# Altium PCB TDA7000v2.PcbDoc
Units mm, origin at the board's own origin, x right, y up, seen from the top; angles counter-clockwise.
Board outline 70 x 54 mm, 2 copper layers (Top Layer, Bottom Layer); 50 components, 34 nets, 132 pads, 13 vias.
Unrouted connection lines stored in the file: 19.
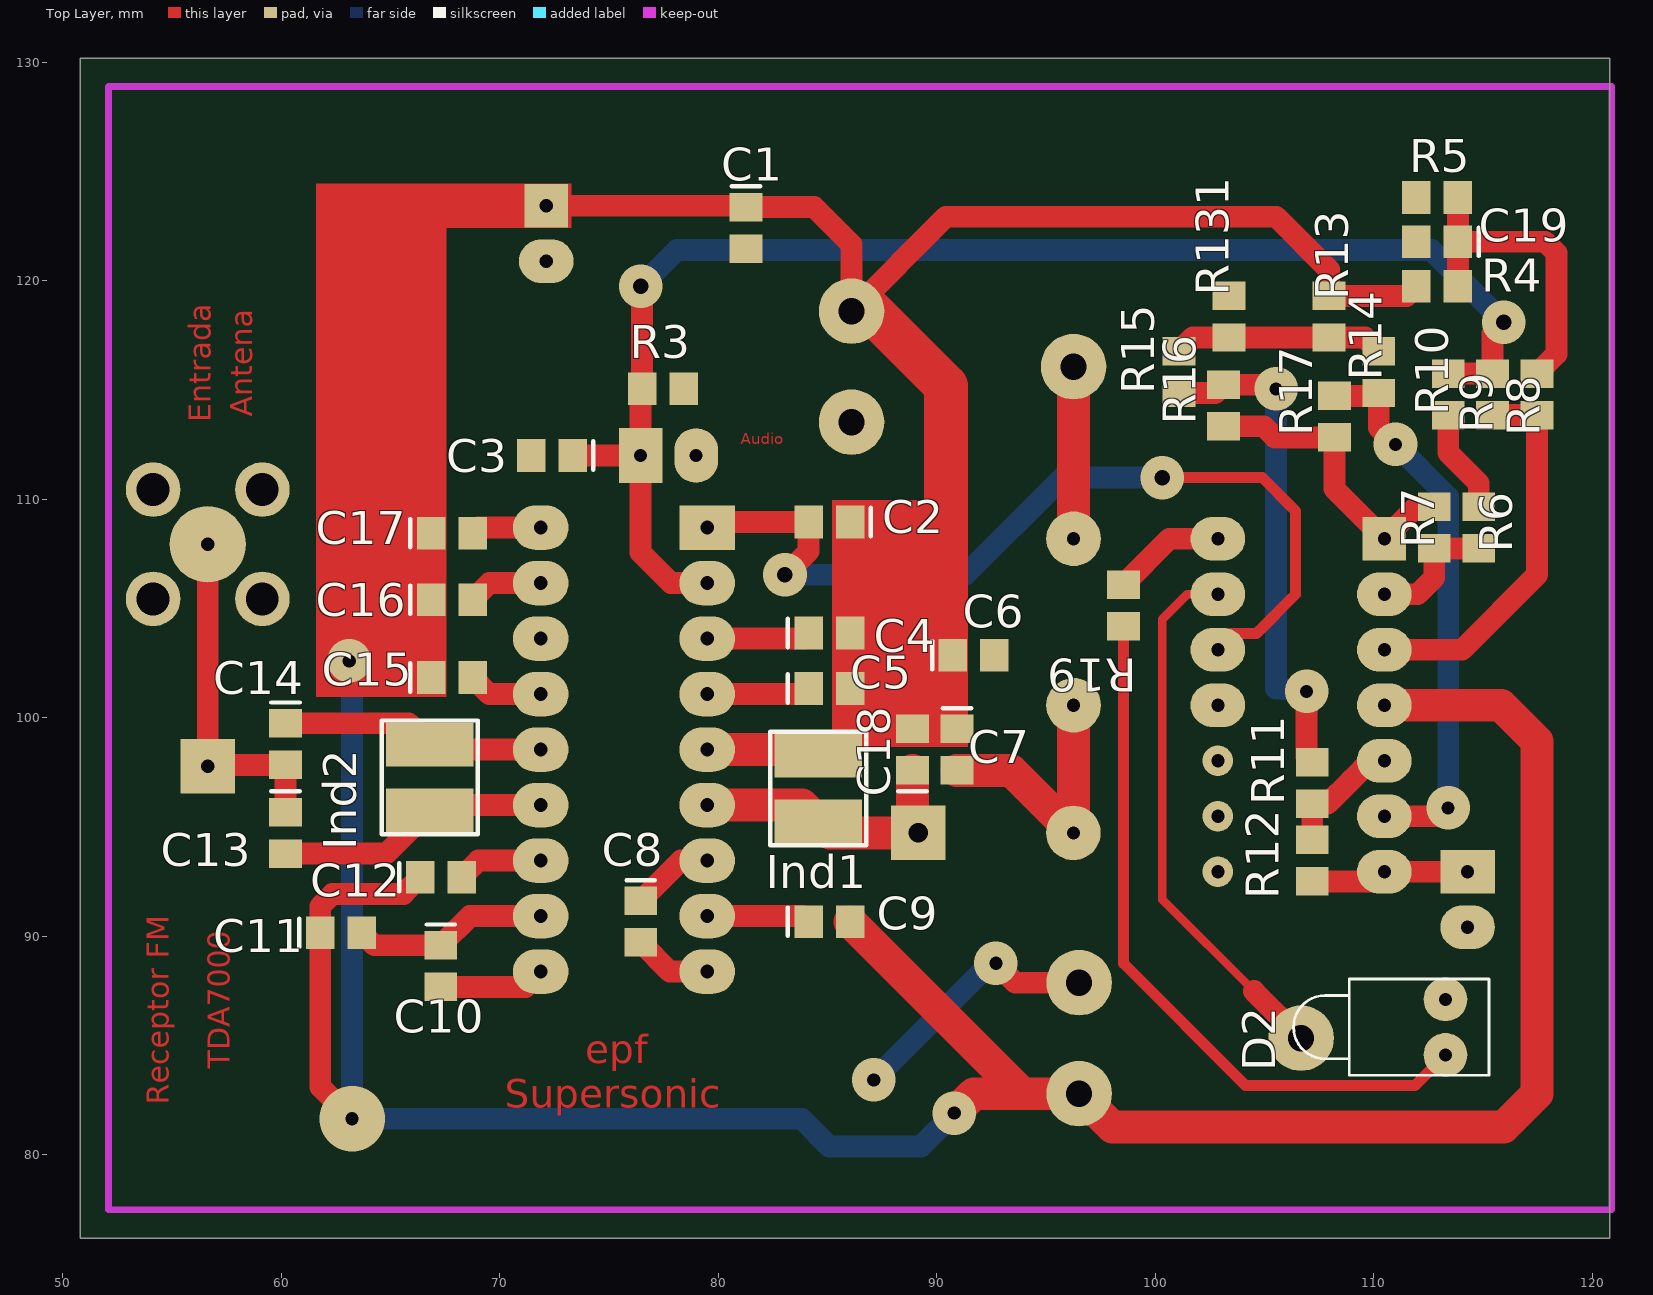
[diagram p0: Top Layer view]
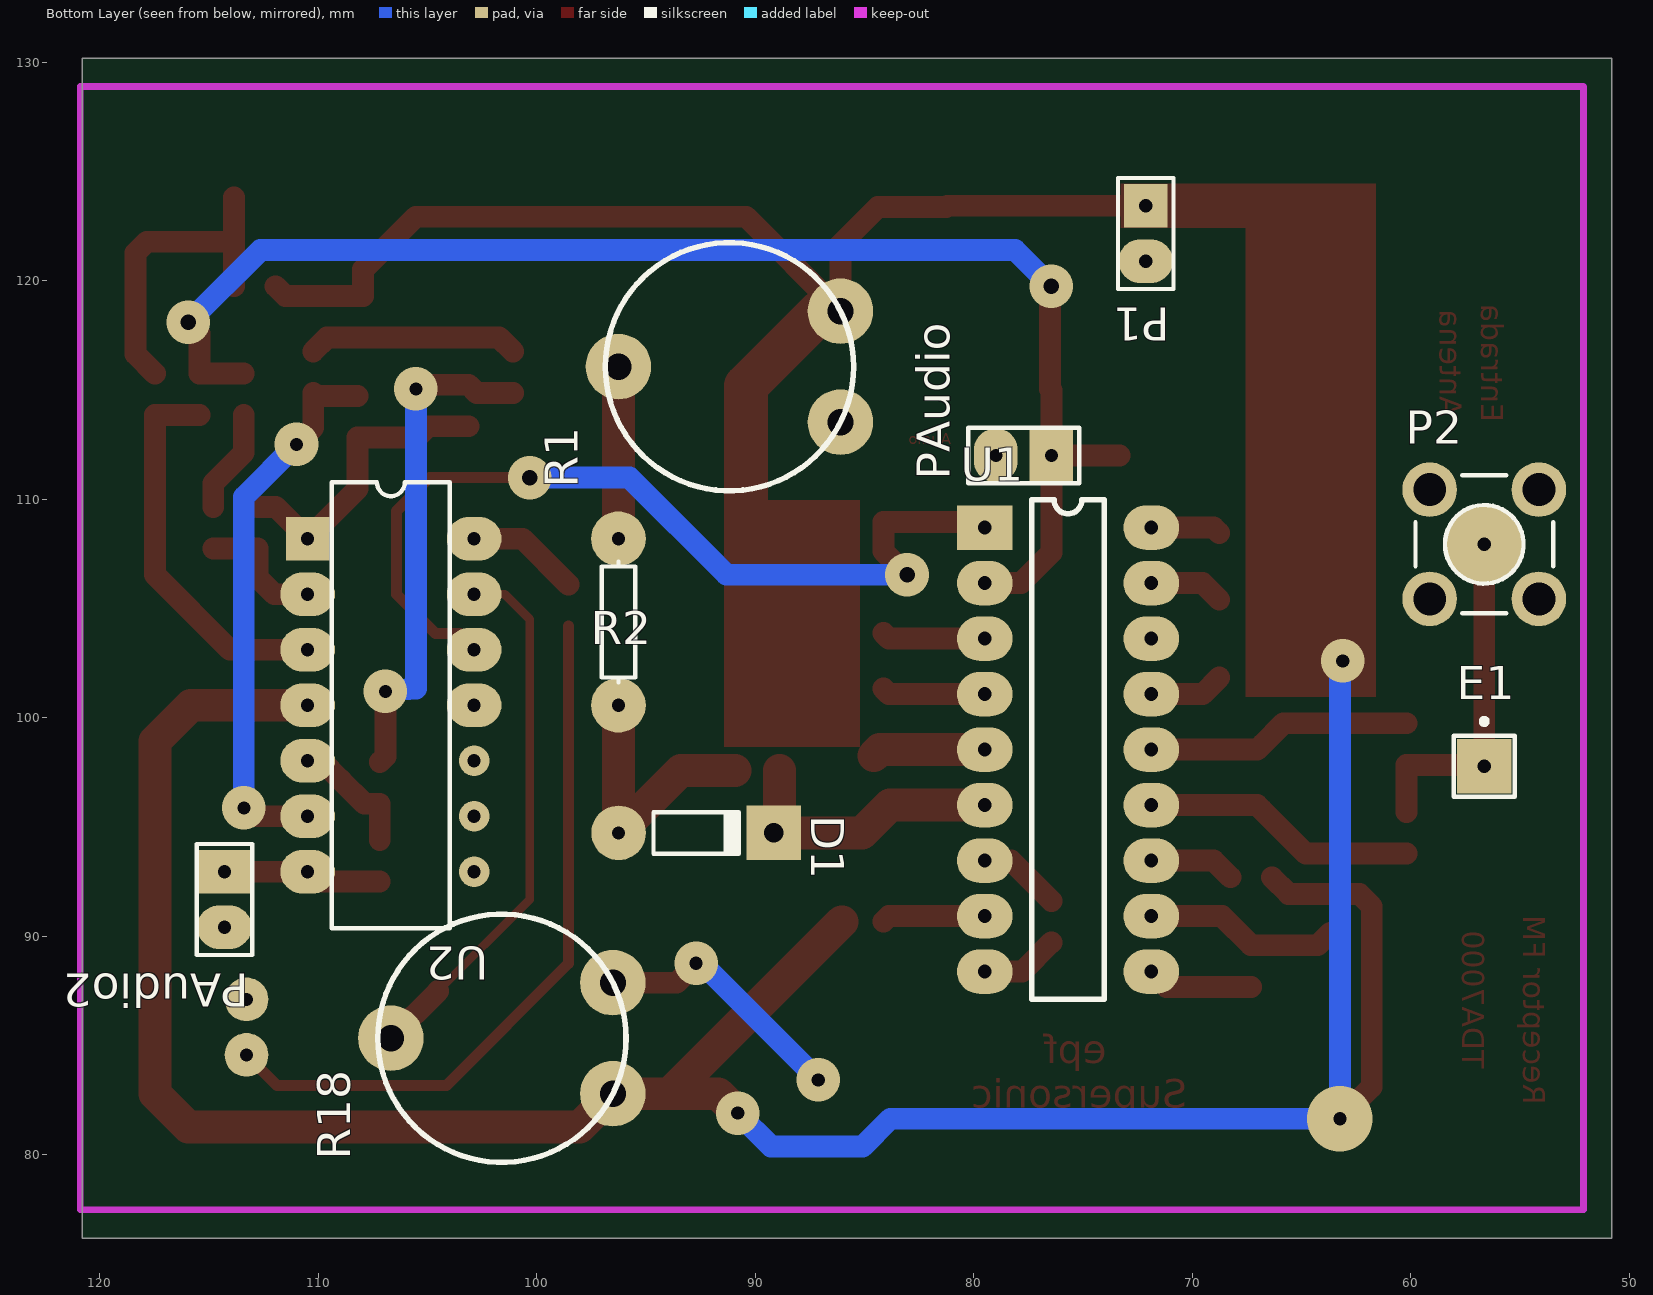
[diagram p1: Bottom Layer view, seen from below]

## Layer stack, top to bottom
Top Layer: signal copper 0.0356
Dielectric: dielectric 0.32, FR-4, Dk 4.8
Bottom Layer: signal copper 0.0356

## Board outline
50.8,76.2 120.8,76.2 120.8,130.2 50.8,130.2

## Design rules (kind name [scope] priority, off if disabled: settings)
Clearance [All] p1: gap=0.3
ComponentClearance [All] p1: gap=0.254 collisioncheckmode=3 verticalgap=0.254
PolygonConnect [All] p1: connectstyle=Direct reliefconductorwidth=0.254 reliefentries=4 polygonreliefangle="90 Angle"
RoomDefinition TDA7000 [InComponentClass('TDA7000')] p1: confinementstyle=ConfineIn formatcopy=TRUE lockcomponents=FALSE outline 47.879,72.644 123.444,72.644 123.444,131.699 47.879,131.699
RoutingVias [All] p1: holewidth=0.6 width=2 viastyle="Through Hole" minholewidth=0.5 minwidth=1.27 maxholewidth=1 maxwidth=5
SolderMaskExpansion [All] p1: expansion=0.102
TestPointUsage [All] p1: valid=0 allowmultiple=FALSE
Testpoint [All] p1: side=15 testpointundercomponent=TRUE minsize=1.016 maxsize=2.54 preferedsize=1.524 minholesize=0 maxholesize=1.016 preferedholesize=0.813 testpointgrid=0.025 style=1023 order=0123456789
Width [All] p1: maxlimit=3 minlimit=0.2 preferedwidth=1.5
18 further rules are at their usual default settings.

## Components (designator, comment, footprint, x,y, rotation, side; value= is the part's Value field where it differs from the comment)
C1 "Cap Pol3" C0805 81.28,122.428 r270 top
C2 "Cap Pol3" C0805 85.09,108.966 r180 top
C3 "Cap Pol3" C0805 72.39,112.014 r180 top
C4 "Cap Pol3" C0805 85.09,103.886 r0 top
C5 "Cap Pol3" C0805 85.09,101.346 r0 top
C6 "Cap Pol3" C0805 91.694,102.87 r0 top
C7 "Cap Pol3" C0805 90.932,98.552 r270 top
C8 "Cap Pol3" C0805 76.454,90.678 r270 top
C9 "Cap Pol3" C0805 85.09,90.678 r0 top
C10 "Cap Pol3" C0805 67.31,88.646 r270 top
C11 "Cap Pol3" C0805 62.738,90.17 r0 top
C12 "Cap Pol3" C0805 67.31,92.71 r0 top
C13 "Cap Pol3" C0805 60.198,94.742 r270 top
C14 "Cap Pol3" C0805 60.198,98.806 r270 top
C15 "Cap Pol3" C0805 67.818,101.854 r0 top
C16 "Cap Pol3" C0805 67.818,105.41 r0 top
C17 "Cap Pol3" C0805 67.818,108.458 r0 top
C18 "Cap Pol3" C0805 88.9,98.552 r90 top
C19 "Cap Pol3" C0805 112.903,121.793 r180 top
D1 "Diode 1N914" DO-35 92.71,94.742 r180 bottom
D2 "LED1" LED-1 113.284,85.852 r180 top
E1 "Antenna" PIN1 56.642,97.79 r180 bottom
Ind1 "Ind2" IND_3MM 84.582,96.774 r90 top
Ind2 "Ind2" IND_3MM 66.802,97.282 r90 top
P1 "Header 2" HDR1X2#1 72.136,123.444 r270 bottom
P2 "SMB" SMB_V-RJ45 56.642,107.95 r180 bottom
PAudio "Header 2" HDR1X2#2 76.454,112.014 r0 bottom
PAudio2 "Header 2" HDR1X2#2 114.3,92.964 r270 bottom
R1 "Pot" POTENCIOMETRO 86.106,116.078 r90 bottom
R2 "Res1" AXIAL-0.3 96.266,104.394 r270 bottom
R3 "Res Semi" 2012[0805] 77.47,115.062 r180 top
R4 "Res Semi" 2012[0805] 112.903,119.761 r0 top
R5 "Res Semi" 2012[0805] 112.903,123.825 r0 top
R6 "Res Semi" 2012[0805] 114.808,108.712 r90 top
R7 "Res Semi" 2012[0805] 112.776,108.712 r270 top
R8 "Res Semi" 2012[0805] 117.475,114.808 r270 top
R9 "Res Semi" 2012[0805] 115.443,114.808 r90 top
R10 "Res Semi" 2012[0805] 113.411,114.808 r90 top
R11 "Res Semi" 2012[0805] 107.188,97.028 r90 top
R12 "Res Semi" 2012[0805] 107.188,93.472 r90 top
R13 "Res Semi" 2012[0805] 107.95,118.364 r270 top
R14 "Res Semi" 2012[0805] 110.236,115.824 r270 top
R15 "Res Semi" 2012[0805] 101.092,115.824 r270 top
R16 "Res Semi" 2012[0805] 103.124,114.3 r90 top
R17 "Res Semi" 2012[0805] 108.204,113.792 r90 top
R18 "Pot" Potenciometro 96.52,85.344 r90 bottom
R19 "Res Semi" 2012[0805] 98.552,105.156 r270 top
R131 "Res Semi" 2012[0805] 103.378,118.364 r90 top
U1 "TDA7000" TDA7000 79.502,108.712 r180 bottom
U2 "TL084ACJ" 632-08 106.68,100.584 r270 bottom

## Footprints (in the part's own frame and the unit in brackets; to place one, negate y for a bottom-side part, rotate by r counter-clockwise, add the part's x,y. Pads: shape width x height; smd on the part's side, far side on the other; paste and mask are expansions set on the pad)
632-08 [mm] "DIP; 14 Leads; Row Spacing 7.62 mm; Pitch 2.54 mm"
  rect 2x2 hole 0.6: 1(-7.62,-3.81)
  oval 2x2.5 hole 0.6: 2(-5.08,-3.81) 3(-2.54,-3.81) 4(0,-3.81) 5(2.54,-3.81) 6(5.08,-3.81) 7(7.62,-3.81) 11(0,3.81) 12(-2.54,3.81) 13(-5.08,3.81) 14(-7.62,3.81)
  round 1.4 hole 0.6: 8(7.62,3.81) 9(5.08,3.81) 10(2.54,3.81)
  silkscreen extent -10.2,-2.7 10.2,2.7
2012[0805] [mm] "Chip Resistor; Body 2.0 x 1.3 mm (LxW typ)"
  rect 1.3x1.5 smd: 1(-0.95,0) 2(0.95,0)
AXIAL-0.3 [mm] "Resistor; 2 Leads"
  round 2.5 hole 0.6: 1(-3.81,0) 2(3.81,0)
  silkscreen extent -2.77,-0.76 2.77,0.76
C0805 [mm] "Chip Capacitor; Body 2.0 x 1.2 mm (LxW typ)"
  rect 1.3x1.5 smd: 1(-0.95,0) 2(0.95,0)
  silkscreen extent -1.9,-0.65 -1.9,0.65
DO-35 [mm] "Diode, Axial; Body 3.8 x 1.9 mm (LxDia. max), Lead Dia. 0.53 mm (max)"
  round 2.5 hole 0.6: 1(-3.55,0)
  rect 2.5x2.5 hole 0.9: 2(3.55,0)
  silkscreen extent -1.95,-0.95 2.05,0.95
HDR1X2#1 [mm] "Connector; Header; 2 Position"
  rect 2x2 hole 0.6: 1(0,0)
  oval 2x2.5 hole 0.6: 2(2.54,0)
  silkscreen extent -1.27,-1.27 3.81,1.27
HDR1X2#2 [mm] "Connector; Header; 2 Position"
  rect 2x2.5 hole 0.6: 1(0,0)
  oval 2x2.5 hole 0.6: 2(2.54,0)
  silkscreen extent -1.27,-1.27 3.81,1.27
IND_3MM [mm]
  rect 2x4 smd: 1(-1.5,0) 2(1.5,0)
  silkscreen extent -2.6,-2.2 2.6,2.2
LED-1 [mm] "Typical RED GaAs LED; 2 Leads"
  round 2 hole 0.6: 1(0,1.27) 2(0,-1.27)
  silkscreen extent -2,-2.2 6.95,2.2
PIN1 [mm] "Generic Antenna; 1 Lead"
  rect 2.5x2.5 hole 0.6: 1(0,0)
  silkscreen extent -1.4,-1.4 1.4,2.17
POTENCIOMETRO [mm]
  round 3 hole 1.2: 1(-2.54,0) 2(2.54,0) 3(0,10.16)
  silkscreen extent -5.68,-0.6 5.68,10.76
Potenciometro [mm]
  round 3 hole 1.2: 1(-2.54,0) 2(2.54,0) 3(0,10.16)
  silkscreen extent -5.68,-0.6 5.68,10.76
SMB_V-RJ45 [mm] "Connector; SMB Straight"
  round 3.5 hole 0.6: 1(0,0)
  round 2.5 hole 1.5: 2(-2.5,-2.5) 2(-2.5,2.5) 2(2.5,-2.5) 2(2.5,2.5)
  silkscreen extent -3.15,-3.15 3.15,3.15
TDA7000 [mil]
  rect 100x80 hole 25: 1(0,0)
  oval 100x80 hole 25: 2(0,-100) 3(0,-200) 4(0,-300) 5(0,-400) 6(0,-500) 7(0,-600) 8(0,-700) 9(0,-800) 10(300,-800) 11(300,-700) 12(300,-600) 13(300,-500) 14(300,-400) 15(300,-300) 16(300,-200) 17(300,-100) 18(300,0)
  silkscreen extent 85,-850 215,50

## Part data
C1 C2 C3 C4 C5 C6 C7 C8 C9 C10 C11 C12 C13 C14 C15 C16 C17 C18 C19: "Polarized Capacitor (Surface Mount)"
D1: "High Conductance Fast Diode"
D2: "Typical RED GaAs LED"
E1: "Generic Antenna"
P1 PAudio PAudio2: "Header, 2-Pin"
P2: "SMB Straight Connector"
R2: "Resistor"
R3 R4 R5 R6 R7 R8 R9 R10 R11 R12 R13 R14 R15 R16 R17 R19 R131: "Semiconductor Resistor"
U2: "JFET-Input Operational Amplifier"

## Via types
v1: diameter 2, hole 0.6, Top Layer to Bottom Layer, 8 vias
v2: diameter 2, hole 0.711, Top Layer to Bottom Layer, 4 vias
v3: diameter 3, hole 0.6, Top Layer to Bottom Layer, 1 vias

## Nets (pads, with @x,y where several pads share a name; then routed paths per layer and width w, separated by ;. In a path a pad name is that pad's centre, name@x,y a point inside that pad or via, vN(x,y) a via of type N, cw(c..) or ccw(c..) an arc to the next point about the centre after c; other vN are vias at no path point)
GND: C1.2 C3.2 C6.2 C19.2 D2.2 P1.2 P2.2 PAudio2.2 PAudio.2 R1.1 R3.1 R5.1 R18.2 R131.2 U1.16 U2.11 | length 12
  Top Layer w1: v1(92.71,88.773) 93.599,87.884 R18.2
  Bottom Layer w1: v1(87.122,83.439) 92.456,88.773 v1(92.71,88.773)
NetC2_2: C2.2 U1.1 U2.12 | length 40.9
  Top Layer w0.5: v2(100.33,110.998) 104.902,110.998 106.426,109.474 106.426,105.664 104.636,103.874 U2.12@103.493,103.874
  Top Layer w1: U1.1 79.756,108.966 C2.2 84.14,107.635 v2(83.058,106.553)
  Bottom Layer w1: v2(83.058,106.553) 91.313,106.553 95.758,110.998 v2(100.33,110.998)
NetC3_1: C3.1 PAudio.1 R3.2 R9.2 R10.2 U1.2 | length 65.1
  Top Layer w1: C3.1 PAudio.1 ; v2(76.454,119.761) 76.52,119.695 R3.2 76.454,114.996 76.454,107.569 77.851,106.172 U1.2 ; R10.2 R9.2 115.443,117.602 v2(115.951,118.11)
  Bottom Layer w1: v2(76.454,119.761) 78.105,121.412 112.649,121.412 v2(115.951,118.11)
NetC4_1: C4.1 U1.3 | length 4.7
  Top Layer w1: U1.3 83.886,103.632 C4.1
NetC5_1: C5.1 U1.4 | length 4.7
  Top Layer w1: U1.4 83.886,101.092 C5.1
NetC7_2: C7.2 D1.1 R2.2 | length 12.4
  Top Layer w1.5: C7.2 93.4,97.602 D1.1 96.266,94.748 R2.2
NetC8_1: C8.1 U1.7 | length 3.8
  Top Layer w1: C8.1 78.298,93.472 U1.7
NetC8_2: C8.2 U1.9 | length 3.6
  Top Layer w1: C8.2 77.79,88.392 U1.9
NetC9_1: C9.1 U1.8 | length 4.7
  Top Layer w1: U1.8 83.886,90.932 C9.1
NetC10_1: C10.1 C11.2 U1.11 | length 9
  Top Layer w1: C11.2 64.262,89.596 C10.1 68.646,90.932 U1.11
NetC10_2: C10.2 U1.10 | length 4.9
  Top Layer w1: C10.2 71.186,87.696 U1.10
NetC12_2: C12.2 U1.12 | length 3.9
  Top Layer w1: C12.2 69.022,93.472 U1.12
NetC13_1: C13.1 C14.2 E1.1 P2.1 | length 15.9
  Top Layer w1: P2.1 E1.1 56.708,97.856 C14.2 C13.1
NetC13_2: C13.2 Ind2.1 U1.13 | length 12.6
  Top Layer w1: C13.2 64.812,93.792 Ind2.1 67.032,96.012 U1.13
NetC14_1: C14.1 Ind2.2 U1.14 | length 12.2
  Top Layer w1: C14.1 65.828,99.756 Ind2.2 67.032,98.552 U1.14
NetC15_2: C15.2 U1.15 | length 3.4
  Top Layer w1: C15.2 69.53,101.092 U1.15
NetC16_2: C16.2 U1.17 | length 3.4
  Top Layer w1: C16.2 69.53,106.172 U1.17
NetC17_2: C17.2 U1.18 | length 3.2
  Top Layer w1: C17.2 69.022,108.712 U1.18
NetC18_1: C18.1 D1.2 Ind1.1 U1.6 | length 13.2
  Top Layer w1.5: U1.6 83.844,96.012 Ind1.1 85.114,94.742 D1.2 88.9,95.002 C18.1
NetC19_1: C19.1 R4.2 R5.2 R8.1 | length 14.7
  Top Layer w1: R4.2 C19.1 ; R5.2 C19.1 ; R8.1 118.364,116.647 118.364,121.285 117.856,121.793 C19.1
NetD2_1: D2.1 R19.2 | length 33.1
  Top Layer w0.5: R19.2 98.552,88.773 104.14,83.185 111.887,83.185 D2.1
NetPAudio2_1: PAudio2.1 R12.1 U2.7 | length 7.3
  Top Layer w1: R12.1 110.048,92.522 U2.7 PAudio2.1
NetR1_3: R1.3 R2.1 | length 7.9
  Top Layer w1.5: R2.1 R1.3
NetR6_1: R6.1 R7.2 U2.2 | length 6
  Top Layer w1: U2.2 112.014,105.664 112.776,106.426 R7.2 R6.1
NetR6_2: R6.2 R10.1 | length 4.8
  Top Layer w1: R10.1 113.411,112.141 114.808,110.744 R6.2
NetR7_1: R7.1 R16.1 R17.1 U2.1 | length 13.8
  Top Layer w1: R16.1 104.963,113.35 105.471,112.842 R17.1 108.204,110.49 U2.1 111.948,109.662 R7.1
NetR8_2: R8.2 R9.1 U2.3 | length 17.7
  Top Layer w1: U2.3 114.046,103.124 117.475,106.553 R8.2 R9.1
NetR11_1: R11.1 R12.2 U2.5 | length 5.8
  Top Layer w1: R12.2 R11.1 107.889,96.078 108.966,97.155 109.855,98.044 U2.5
NetR11_2: R11.2 R15.2 R16.2 | length 23.1
  Top Layer w1: R15.2 102.748,114.874 R16.2 105.349,115.25 v1(105.537,115.062) ; v1(106.934,101.219) 106.934,98.232 R11.2
  Bottom Layer w1: v1(105.537,115.062) 105.537,101.346 v1(106.934,101.219)
NetR13_2: R13.2 R14.1 R15.1 R131.1 | length 9.7
  Top Layer w1: R15.1 101.732,117.414 R13.2 109.596,117.414 R14.1
NetR14_2: R14.2 R17.2 U2.6 | length 25.5
  Top Layer w1: R17.2 110.104,114.742 R14.2 110.236,113.284 v1(110.998,112.522) ; U2.6 113.03,95.504 v1(113.411,95.885)
  Bottom Layer w1: v1(110.998,112.522) 113.411,110.109 v1(113.411,95.885)
NetR18_3: R18.3 U2.13 | length 25.8
  Top Layer w0.4: 102.87,103.124 103.886,103.124 ; U2.13 101.473,105.664 100.33,104.521 100.33,91.694 104.521,87.503
  Top Layer w1: 104.521,87.503 R18.3
NetR19_1: R19.1 U2.14 | length 5.2
  Top Layer w1: R19.1 100.65,108.204 U2.14
VCC: C1.1 C2.1 C4.2 C5.2 C6.1 C7.1 C9.2 C11.1 C12.1 C15.1 C16.1 C17.1 C18.2 Ind1.2 P1.1 R1.2 R4.1 R13.1 R18.1 U1.5 U2.4 | length 203.7
  Top Layer w1: v3(63.246,81.661) 61.788,83.119 61.788,91.379 62.357,91.948 65.598,91.948 C12.1 ; P1.1 81.214,123.444 C1.1 84.394,123.378 86.106,121.666 R1.2 90.424,122.936 105.537,122.936 107.95,120.523 R13.1 111.506,119.314 R4.1 ; C2.1 90.297,108.966 90.424,109.093
  Top Layer w1.5: U1.5 84.304,98.552 Ind1.2 ; C9.2 93.914,82.804 ; v1(90.805,81.915) 91.694,82.804 R18.1 98.044,81.28 115.951,81.28 117.475,82.804 117.475,98.933 115.824,100.584 U2.4
  Top Layer w2: R1.2 86.995,118.618 90.424,115.189 C6.1@90.424,102.997
  Bottom Layer w1: v1(63.119,102.616) 63.246,102.489 v3(63.246,81.661) 83.82,81.661 85.09,80.391 89.281,80.391 v1(90.805,81.915)
pads on no net: U2.8 U2.9 U2.10

## Keep-outs
Keep-Out Layer:
  lines w0.3: 52.1,77.5 52.1,128.9 120.904,128.9 120.904,77.5 52.1,77.5

## Other copper
Top Layer:
  rectangle net VCC: 62.611,122.428 73.279,124.46
  rectangle net VCC: 61.595,100.965 67.564,124.46
  rectangle net VCC: 85.217,98.679 91.44,109.982
  text "Antena" at 58.674,113.792 h1 r90
  text "Entrada" at 56.769,113.538 h1 r90
  text "Audio" at 81.026,112.522 h0.5
  text "epf" at 73.914,84.201 h1.3
  text "TDA7000" at 57.658,83.947 h1 r90
  text "Receptor FM" at 54.864,82.296 h1 r90
  text "Supersonic" at 70.231,82.169 h1.3

## Silkscreen, mask and mechanical layers (free items; w line width, h text height)
Drill Drawing:
  text ".LEGEND" at 125.88,81.28 h1.52
  text "Drill Drawing." at 125.88,78.74 h1.52

## Dimensions
52.1,77.5 to 52.1,128.9 on Mechanical 1
52.1,77.5 to 120.904,77.5 on Mechanical 1